# Altium PCB CH32X035F7P6-R0-1v0.PcbDoc
Units mil, origin at the board's own origin, x right, y up, seen from the top; angles counter-clockwise.
Board outline 1496.06 x 2165.35 mil, 2 copper layers (Top Layer, Bottom Layer); 30 components, 32 nets, 135 pads, 147 vias.
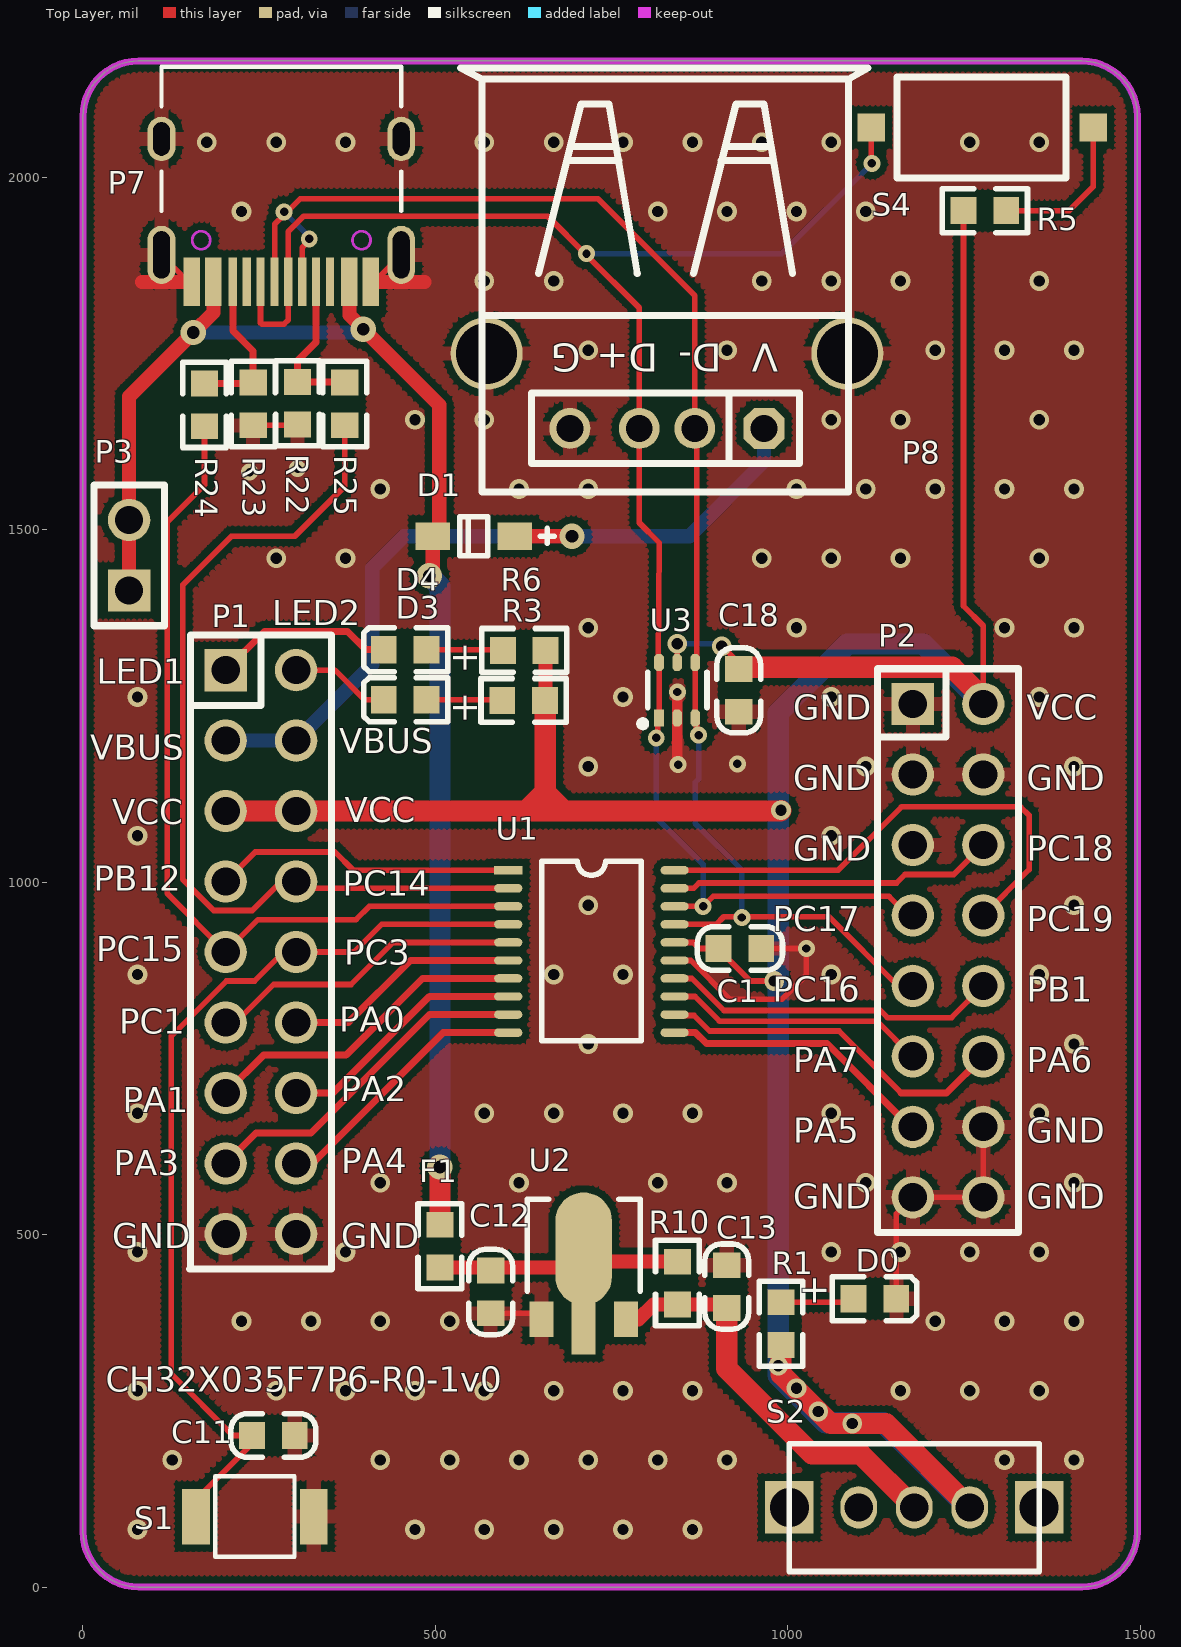
[diagram p0: Top Layer view]
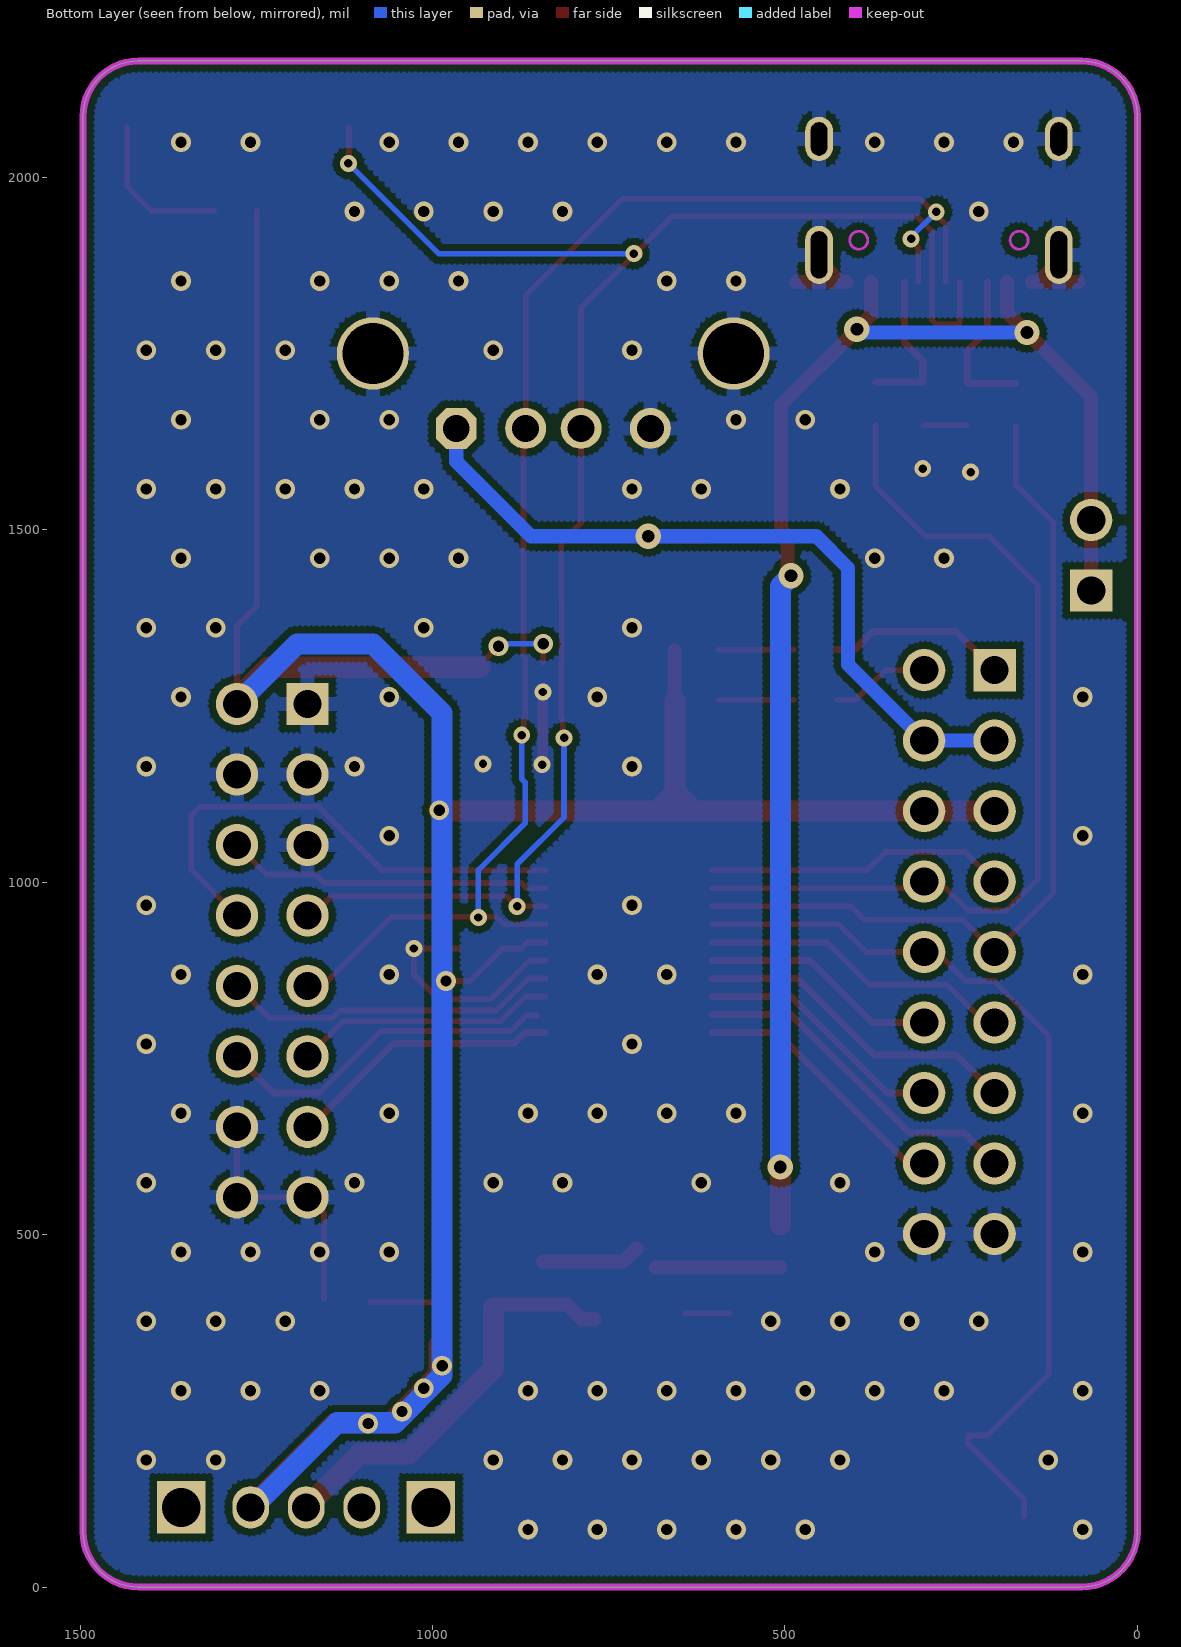
[diagram p1: Bottom Layer view, seen from below]

## Layer stack, top to bottom
Top Solder: solder mask 0.4, Solder Resist, Dk 3.5
Top Layer: signal copper 1.4
Dielectric1: dielectric 12.6, FR-4, Dk 4.8
Bottom Layer: signal copper 1.4
Bottom Solder: solder mask 0.4, Solder Resist, Dk 3.5

## Board outline
0,78.74 0,2086.61 cw(c78.74,2086.61) 78.74,2165.35 1417.32,2165.35 cw(c1417.32,2086.61) 1496.06,2086.61 1496.06,78.74 cw(c1417.32,78.74) 1417.32,0 78.74,0 cw(c78.74,78.74)

## Design rules (kind name [scope] priority, off if disabled: settings)
Clearance Clearance_1 [InPolygon] p1: gap=10 ignorepadtopadclearanceinfootprint=FALSE
Clearance [All] p2: gap=6 ignorepadtopadclearanceinfootprint=FALSE except(8: Arc-Via Track-Via SMDPad-Via THPad-Via Via-Via Via-Fill Via-Poly Via-Region Via-Hole)
ComponentClearance [All] p1 off: gap=10 collisioncheckmode=3 verticalgap=10 showdistances=FALSE
DiffPairsRouting [All] p1: maxlimit=10 minlimit=7 mostfreqgap=8 toplayer_minwidth=6 toplayer_maxwidth=15 toplayer_prefwidth=8 bottomlayer_minwidth=6 bottomlayer_maxwidth=15 bottomlayer_prefwidth=8 maxuncoupledlength=500
MinimumSolderMaskSliver [All] p1 off: minsoldermaskwidth=10
PolygonConnect PolygonConnect_1 [IsVia] p1: connectstyle=Direct reliefconductorwidth=10 reliefentries=4 polygonreliefangle="90 Angle" airgapwidth=10
PolygonConnect [All] p2: connectstyle=Relief reliefconductorwidth=20 reliefentries=4 polygonreliefangle="90 Angle" airgapwidth=10
RoutingVias [All] p1: holewidth=16 width=28 viastyle="Through Hole" minholewidth=12 minwidth=24 maxholewidth=28 maxwidth=50
SilkToSilkClearance [All] p1 off: silktosilkclearance=10
SilkToSolderMaskClearance [IsPad] p1 off: minsilkscreentomaskgap=10 clearancetoexposedcopper=TRUE
SolderMaskExpansion [All] p1: expansion=2 istentingtop=FALSE
Width [All] p1: maxlimit=100 minlimit=6 preferedwidth=10
25 further rules are at their usual default settings.

## Components (designator, comment, footprint, x,y, rotation, side; value= is the part's Value field where it differs from the comment)
C1 "0.1uF" 0603_C 962.48,906 r180 top
C11 "0.1uF" 0603_C 300.48,215 r180 top
C12 "10uF" 0603_C 578.48,449 r270 top
C13 "10uF" 0603_C 913.48,396 r90 top
C18 "0.1uF" 0603_C 930.48,1242 r90 top
D0 "POWER  red" 0603+ 1093.48,409 r0 top
D1 "Diode" SOD-123 612.48,1491 r180 top
D3 "LED2" 0603+ 487.48,1259 r180 top
D4 "LED1" 0603+ 487.48,1330 r180 top
F1 "500mA" 0603 506.48,514 r270 top
P1 "Header 9X2" IDC18-2.54mm 202.48,1301 r0 top
P2 "Header 8X2" IDC16-2.54mm 1177.48,1253 r0 top
P3 "HEADER 2" SIP2-2.54mm 65.48,1414 r0 top
P7 "TYPE-C" TYPE-C-Receptacle-2.0 281.48,1852 r180 top
P8 "USB_A" USBAF 966.48,1644 r180 top
R1 "1K" 0603 990.48,404 r270 top
R3 "1K" 0603 655.48,1258 r180 top
R5 "4.7K" 0603 1249.48,1953 r0 top
R6 "1K" 0603 656.48,1329 r180 top
R10 "NC(0Ω)" 0603 843.48,401 r90 top
R22 "5.1K" 0603 304.48,1710 r270 top
R23 "5.1K" 0603 241.48,1709 r270 top
R24 "0Ω" 0603 172.48,1647 r90 top
R25 "0Ω" 0603 371.48,1709 r270 top
S1 "KEY" 贴片按键 160.48,100 r0 top
S2 "SW" SW1 1179.48,113 r0 top
S4 "Download" SMD_6.1x3.65x2.5mm-KEY 1433.48,2071 r180 top
U1 "CH32X035F7P6" TSSOP20 603.48,1017 r270 top
U2 "HT7533" SOT-89 650.48,380 r0 top
U3 "CH412K" SOT-363 817.48,1233 r0 top

## Footprints (in the part's own frame and the unit in brackets; to place one, negate y for a bottom-side part, rotate by r counter-clockwise, add the part's x,y. Pads: shape width x height; smd on the part's side, far side on the other; paste and mask are expansions set on the pad)
0603 [mm]
  rect 0.93x0.98 smd: 1(0,0) 2(1.54,0)
  silkscreen extent -0.76,-0.79 2.3,0.79
0603+ [mm]
  rect 0.93x0.98 smd: 1(0,0) 2(1.54,0)
  silkscreen extent -0.76,-0.79 2.27,0.79
0603_C [mm]
  rect 0.93x0.98 smd mask+0.051: 1(0,0) 2(1.54,0)
  silkscreen extent -0.76,-0.79 2.31,0.79
IDC16-2.54mm [mil]
  rect 60x60 hole 40: 1(0,0)
  round 60 hole 40: 2(100,0) 3(0,-100) 4(100,-100) 5(0,-200) 6(100,-200) 7(0,-300) 8(100,-300) 9(0,-400) 10(100,-400) 11(0,-500) 12(100,-500) 13(0,-600) 14(100,-600) 15(0,-700) 16(100,-700)
  silkscreen extent -50,-750 150,50
IDC18-2.54mm [mil]
  rect 60x60 hole 40: 1(0,0)
  round 60 hole 40: 2(100,0) 3(0,-100) 4(100,-100) 5(0,-200) 6(100,-200) 7(0,-300) 8(100,-300) 9(0,-400) 10(100,-400) 11(0,-500) 12(100,-500) 13(0,-600) 14(100,-600) 15(0,-700) 16(100,-700) 17(0,-800) 18(100,-800)
  silkscreen extent -51,-850 150,50
SIP2-2.54mm [mil]
  rect 60x60 hole 40: 1(0,0)
  round 60 hole 40: 2(0,100)
  silkscreen extent -50,-50 50,150
SMD_6.1x3.65x2.5mm-KEY [mm]
  rect 1x1 smd: 1(0,0) 2(8,0)
  silkscreen extent 0.98,-1.83 7.08,1.83
SOD-123 [mm]
  rect 1.25x1 smd: 1(0,0) 2(2.95,0)
  silkscreen extent -1.43,-0.7 1.97,0.7
SOT-89 [mil]
  rect 34x50 smd: 1(0,0) 3(120,0)
  rect 34x100 smd: 2(60,0)
  oval 80x160 smd: ""(60,100)
  silkscreen extent -20,40 140,170
SOT-363 [mm]
  rect 0.35x0.6 smd mask+0.051: 1(0,0)
  oct 0.35x0.6 smd mask+0.051: 2(0.65,0) 3(1.3,0) 4(1.3,2) 5(0.65,2) 6(0,2)
  silkscreen extent -0.7,-0.31 1.73,1.65
SW1 [mm]
  rect 1.75x1.9 hole 1.4: 0(-4.5,0) 0(4.5,0)
  oval 1.321x1.524 hole 1.016: 1(0,0) 2(-2,0) 3(2,0)
  silkscreen extent -4.51,-2.31 4.5,2.29
TSSOP20 [mil]
  rect 12x40 smd: 1(0,0)
  oval 12x40 smd: 2(25.6,0) 3(51.2,0) 4(76.8,0) 5(102.4,0) 6(128,0) 7(153.5,0) 8(179.1,0) 9(204.7,0) 10(230.3,0) 11(230.3,236) 12(204.7,236) 13(179.1,236) 14(153.5,236) 15(128,236) 16(102.4,236) 17(76.8,236) 18(51.2,236) 19(25.6,236) 20(0,236)
  silkscreen extent -13,47 242,189
TYPE-C-Receptacle-2.0 [mm]
  oval 1x2.1 hole 0.6 slot 1.7 at 90 deg: 0(-4.32,-0.97) 0(4.32,-0.97)
  oval 1x1.6 hole 0.6 slot 1.2 at 90 deg: 0(-4.32,-5.15) 0(4.32,-5.15)
  rect 0.6x1.75 smd mask+0.051: A1(-3.225,0) A4(-2.45,0) B1(3.225,0) B4(2.45,0)
  rect 0.3x1.75 smd mask+0.051: A5(-1.25,0) A6(-0.25,0) A7(0.25,0) A8(1.25,0) B5(1.75,0) B6(0.75,0) B7(-0.75,0) B8(-1.75,0)
  Keep-Out Layer circle w0.1: c-2.89,-1.5 r0.325
  Keep-Out Layer circle w0.1: c2.89,-1.5 r0.325
  silkscreen extent -4.32,-7.75 4.32,-2.55
USBAF [mm]
  round 2.6 hole 2.2: 0(-3,-2.7) 0(10,-2.7)
  oct 1.473x1.473 hole 0.965: 1(0,0)
  round 1.473 hole 0.965: 2(2.5,0) 3(4.5,0) 4(7,0)
  silkscreen extent -3.75,-12.99 10.95,2.29
贴片按键 [mm]
  rect 1x2 smd: 1(0,0) 2(4.242,0)
  silkscreen extent 0.69,-1.45 3.55,1.45

## Part data
C1 C11 C18: library part Cap, "Capacitor"
  C11: LatestRevisionDate=17-Jul-2002, LatestRevisionNote="Re-released for DXP Platform.", PackageReference=RAD-0.3, Published=8-Jun-2000, Publisher="Altium Limited"
C12 C13: library part CAP, "Capacitor"
D0 D3 D4: library part LED0, "Typical INFRARED GaAs LED", LatestRevisionDate=08-Jul-2005, LatestRevisionNote="Mech Layer 1 removed.", PackageReference=LED-0, Published=8-Jun-2000, Publisher="Altium Limited"
D1: "Default Diode", Code_JEDEC=DO-214-AB, LatestRevisionDate=17-Jul-2002, LatestRevisionNote="Re-released for DXP Platform.", PackageReference=SMC, PackageVersion=Sep-1996, Published=8-Jun-2000, Publisher="Altium Limited"
F1: library part FUSE1, "Fuse"
P1: "Header, 9-Pin, Dual row", LatestRevisionDate=17-Jul-2002, LatestRevisionNote="Re-released for DXP Platform.", Publisher="Altium Limited"
P2: "Header, 8-Pin, Dual row", LatestRevisionDate=17-Jul-2002, LatestRevisionNote="Re-released for DXP Platform.", Publisher="Altium Limited"
P3: "Header, 2-Pin"
P7: library part TYPE-C1
P8: library part USB, "USB Port"
R1 R3 R6: library part "Res Semi", "Semiconductor Resistor"
R5 R10 R22 R23 R24 R25: library part Res2, "Resistor"
S4: library part KEY1
U1: "RISC-V MCU with USB/PD/ADC/SPI/I2C/UART/OA/CMP"
U2: library part 1117-3.3V
U3: "Qaud ESD protect, high speed"

## Via types
v1: diameter 27.99, hole 16, Top Layer to Bottom Layer, tented both sides, 120 vias
v2: diameter 24, hole 12, Top Layer to Bottom Layer, tented both sides, 14 vias
v3: diameter 28, hole 16, Top Layer to Bottom Layer, tented both sides, 8 vias
v4: diameter 36, hole 18, Top Layer to Bottom Layer, tented both sides, 5 vias

## Nets (pads, with @x,y where several pads share a name; then routed paths per layer and width w, separated by ;. In a path a pad name is that pad's centre, name@x,y a point inside that pad or via, vN(x,y) a via of type N, cw(c..) or ccw(c..) an arc to the next point about the centre after c; other vN are vias at no path point)
5V: C12.1 F1.2 R10.2 U2. U2.2 | length 318
  Top Layer w20: F1.2 U2.@683.85,453.37 ; U2. 728.85,461.63 R10.2
CC1: P1.8 R25.2 U1.2 | length 1293.5
  Top Layer w8: R25.2 371.48,1562 300.48,1491 210.48,1491 141.48,1422 141.48,1004.02 167.49,978.01 185.5,960 240.27,960 281.27,1001 P1.8 312.08,991.4 U1.2
CC2: P1.9 R24.1 U1.3 | length 1230.2
  Top Layer w8: R24.1 172.48,1564 119.48,1511 119.48,984 P1.9 248.48,947 387.48,947 406.28,965.8 U1.3
GND: C1.1 C11.1 C12.2 C13.2 C18.1 D0.2 P1.17 P1.18 P2.1 P2.3 P2.4 P2.5 P2.14 P2.15 P2.16 P7.0 P7.A1 P7.B1 P8.0 P8.4 R22.2 R23.2 S1.2 U1.15 U2.1 U3.2 | length 1181
  Top Layer w8: P7.0@116.32,1890.19 111.4,1890.19 149.59,1852 P7.B1 ; R23.2 R22.2@303.48,1648.37 ; P7.A1 413.37,1852 P7.0@451.56,1890.19 ; C12.2 U2.1@642.11,388.37 ; U1.15 862.48,889 917.48,834 991.77,834 1026.48,868.71 v2(1026.48,906) C1.1 ; D0.2 1154.11,529.63 P2.15 P2.16 P2.14
  Top Layer w15: v2@843.48,1169.08 v2(843.48,1270)
  Top Layer w20: 83.65,1852 P7.B1@149.59,1852 ; P7.A1@413.37,1852 484.48,1852 ; v2@843.48,1169.08 844.48,1168.08 v2(844.48,1167)
  Bottom Layer w8: P2.5@1164.48,1053 P2.5
  other v1: 77.36,81.65 471.06,81.65 569.49,81.65 667.91,81.65 766.34,81.65 864.76,81.65 126.57,180.08 421.85,180.08 520.28,180.08 618.7,180.08 717.13,180.08 815.55,180.08 913.98,180.08 1307.68,180.08 1406.1,180.08 77.36,278.5 274.21,278.5 372.64,278.5 471.06,278.5 569.49,278.5 667.91,278.5 766.34,278.5 864.76,278.5 1160.04,278.5 1258.46,278.5 1356.89,278.5 225,376.93 323.43,376.93 421.85,376.93 520.28,376.93 1209.25,376.93 1307.68,376.93 1406.1,376.93 77.36,475.35 372.64,475.35 1061.61,475.35 1160.04,475.35 1258.46,475.35 1356.89,475.35 421.85,573.78 618.7,573.78 815.55,573.78 913.98,573.78 1110.83,573.78 1406.1,573.78 77.36,672.2 569.49,672.2 667.91,672.2 766.34,672.2 864.76,672.2 1061.61,672.2 1356.89,672.2 717.13,770.63 1406.1,770.63 77.36,869.06 667.91,869.06 766.34,869.06 1061.61,869.06 1356.89,869.06 717.13,967.48 1406.1,967.48 77.36,1065.91 1061.61,1065.91 717.13,1164.33 1110.83,1164.33 1406.1,1164.33 77.36,1262.76 766.34,1262.76 1061.61,1262.76 1356.89,1262.76 717.13,1361.18 1012.4,1361.18 1307.68,1361.18 1406.1,1361.18 274.21,1459.61 372.64,1459.61 963.19,1459.61 1061.61,1459.61 1160.04,1459.61 1356.89,1459.61 421.85,1558.03 618.7,1558.03 717.13,1558.03 1012.4,1558.03 1110.83,1558.03 1209.25,1558.03 1307.68,1558.03 1406.1,1558.03 471.06,1656.46 569.49,1656.46 1061.61,1656.46 1160.04,1656.46 1356.89,1656.46 717.13,1754.88 913.98,1754.88 1209.25,1754.88 1307.68,1754.88 1406.1,1754.88 569.49,1853.31 667.91,1853.31 963.19,1853.31 1061.61,1853.31 1160.04,1853.31 1356.89,1853.31 225,1951.73 815.55,1951.73 913.98,1951.73 1012.4,1951.73 1110.83,1951.73 175.79,2050.16 274.21,2050.16 372.64,2050.16 569.49,2050.16 667.91,2050.16 766.34,2050.16 864.76,2050.16 963.19,2050.16 1061.61,2050.16 1258.46,2050.16 1356.89,2050.16
  other v2: 928.48,1168 236.48,1582 304.48,1587
LED1: D4.2 P1.1 | length 257.9
  Top Layer w10: P1.1 257.48,1356 375.48,1356 401.48,1330 D4.2
LED2: D3.2 P1.2 | length 141.8
  Top Layer w8: P1.2 357.48,1301 399.48,1259 D3.2
NetC13_1: C13.1 R10.1 S2.1 U2.3 | length 580.3
  Top Layer w20: U2.3 788.48,380 809.48,401 R10.1 C13.1@908.48,401
  Top Layer w30: C13.1 913.48,310 1034.48,189 1103.48,189 S2.1
NetD0_1: D0.1 R1.1 | length 98
  Top Layer w8: R1.1 D0.1@1088.48,404
NetD3_1: D3.1 R3.2 | length 106.4
  Top Layer w8: D3.1 R3.2@593.85,1259
NetD4_1: D4.1 R6.2 | length 107.4
  Top Layer w8: D4.1 R6.2@594.85,1330
NetP7_A5: P7.A5 R22.1 R25.1 | length 218.9
  Top Layer w10: P7.A5 330.69,1766.21 304.48,1740 R22.1 R25.1@370.48,1710
NetP7_B5: P7.B5 R23.1 R24.2 | length 222.6
  Top Layer w10: R24.2 R23.1@240.11,1707.63 ; P7.B5 212.58,1782.9 241.48,1754 R23.1
NetR5_2: R5.2 S4.1 | length 221.5
  Top Layer w8: R5.2 1399.48,1953 1433.48,1987 S4.1
PA0: P1.12 U1.6 | length 337.5
  Top Layer w10: P1.12 376.48,801 464.48,889 U1.6
PA1: P1.13 U1.7 | length 468.3
  Top Layer w10: P1.13 256.48,755 373.48,755 481.98,863.5 U1.7
PA2: P1.14 U1.8 | length 357.7
  Top Layer w10: P1.14 354.48,701 491.38,837.9 U1.8
PA3: P1.15 U1.9 | length 488.5
  Top Layer w10: P1.15 245.48,644 323.48,644 491.78,812.3 U1.9
PA4: P1.16 U1.10 | length 377.9
  Top Layer w10: P1.16 325.48,601 511.18,786.7 U1.10
PA5: P2.13 U1.11 | length 393.4
  Top Layer w10: U1.11 868.78,786.7 884.48,771 1055.48,771 1173.48,653 P2.13
PA6: P2.12 U1.12 | length 493.1
  Top Layer w8: U1.12@851.48,811 867.11,811 889.11,789 1073,789 1161,701
  Top Layer w10: 1161,701 1225.48,701 P2.12
PA7: P2.11 U1.13 | length 373.2
  Top Layer w8: U1.13 868.37,837.9 903.27,803 1040.55,803 1126.68,803 1176.68,753 P2.11
PB1: P2.10 U1.14 | length 479.6
  Top Layer w8: U1.14 863.98,863.5 909.48,818 1131.48,818 1141.48,808 1232.48,808 P2.10
PB12: P1.7 U1.1 | length 429.2
  Top Layer w8: P1.7 244.48,1043 357.48,1043 383.48,1017 U1.1
PC1: P1.11 U1.5 | length 448.1
  Top Layer w8: P1.11 216.48,801 270.48,855 380.48,855 440.08,914.6 U1.5
PC3: C11.2 P1.10 S1.1 U1.4 | length 1321.8
  Top Layer w8: S1.1 160.48,124 239.85,203.37 C11.2 212.48,215 125.48,302 125.48,781.98 203.5,860 243.48,860 284.48,901 P1.10 384.48,901 423.68,940.2 U1.4
PC16: P2.9 P7.A7 P7.B7 P8.2 U1.17 U3.3 U3.4 | length 2147.7
  Top Layer w8: P7.A7 272,1852.36 272,1933.61 285.27,1946.88 v2(285.27,1951.21) ; v2@287.48,1949 308.48,1970 730.48,1970 868.06,1832.43 P8.2 871,1641.06 871,1320.1 868.66,1317.76 U3.3 870.45,1231.21 870.45,1211.85 v2(873.48,1208.82) ; P7.B7 311.01,1900.31 321,1910.31 v2(321,1913) ; U1.17 898.45,940.2 909.25,951 1058.48,951 P2.9@1156.58,852.9 ; P2.9@1177.38,852.9 P2.9
  Bottom Layer w8: v2(285.27,1951.21) 321,1915.48 v2(321,1913) ; v2(873.48,1208.82) 873.48,1146.56 868.66,1141.74 868.66,1083.82 935,1017.48 v2(935,950)
PC17: P2.7 P7.A6 P7.B6 P8.3 S4.2 U1.18 U3.1 U3.6 | length 2533.4
  Top Layer w8: P7.B6 251.95,1793.47 253.43,1792 285.48,1792 291.32,1797.84 P7.A6 291.32,1923.32 313,1945 659.48,1945 713.48,1891 789.32,1815.17 P8.3 789.32,1510.17 817.48,1482 U3.6@816.48,1311.75 ; v2(813.48,1205) 815.48,1207 815.48,1231 U3.1 U3.6 ; U1.18 v2(879.97,965.8) 894.17,980 1143.71,980 1170.71,953 P2.7 ; v2@1118.52,2028.04 S4.2
  Bottom Layer w8: v2(714.48,1892) 991.48,1892 v2(1119.48,2020) ; v2(813.48,1205) 813.48,1092 879.97,1025.51 v2(879.97,965.8)
PC18: P2.6 U1.19 | length 463.5
  Top Layer w8: U1.19 866.4,991.4 874,999 1154.48,999 1166.48,1011 1235.48,1011 P2.6
PC19: P2.8 U1.20 | length 714.2
  Top Layer w8: U1.20 1071.48,1017 1161.48,1107 1330.48,1107 1342.48,1095 1342.48,1018 P2.8
VBUS: D1.1 P1.3 P1.4 P8.1 | length 1140.3
  Top Layer w20: D1.1 v4(693.85,1491) v4@697.48,1491
  Bottom Layer w20: P1.3 P1.4 410.48,1309 410.48,1446 455.48,1491 v4(693.85,1491) 860.48,1491 966.48,1597 P8.1
VBUS1: D1.2 F1.1 P3.1 P3.2 P7.A4 P7.B4 | length 2153.8
  Top Layer w8: P7.B4@185.02,1820.7 P7.B4
  Top Layer w20: P3.1 P3.2 65.48,1689 v4(156.51,1780.03) 185.02,1808.54 P7.B4 ; P7.A4 377.94,1804.69 v4(397.89,1784.73) 505.48,1677.14 505.48,1500.14 D1.2 v4@496.34,1444.14
  Top Layer w30: F1.1 v4(506.48,596)
  Bottom Layer w20: v4(156.51,1780.03) 393.19,1780.03 v4(397.89,1784.73)
  Bottom Layer w30: v4(491.48,1435) 506.48,1420 v4(506.48,596)
VCC: C1.2 C18.2 P1.5 P1.6 P2.2 R1.2 R3.1 R5.1 R6.1 S2.3 U1.16 U3.5 | length 4500.7
  Top Layer w8: R3.1 R3.1@655.96,1257.52 ; U1.16 865.88,914.6 874.48,906 884.48,906 C1.2 901.85,905.02 946.87,860 v3(981,860) ; U3.5 v3(843.07,1338.59) ; v3(906.48,1335) C18.2@930.48,1311 ; R5.1 1249.48,1392 1277.48,1364 1277.48,1261 P2.2
  Top Layer w20: R3.1@656.48,1259 R6.1
  Top Layer w30: P1.5 P1.6 628.48,1101 ; 655.96,1127.52 R3.1@655.96,1257.52 ; C18.2@932.85,1305 1233.48,1305 P2.2@1277.48,1261 ; R1.2 990.48,302 v3(1043.48,249) 1060.48,232 v3(1091.48,232) 1139.22,232 S2.3 ; v3(990.48,1102) 989.48,1101 682.48,1101 ; 628.48,1101 655.48,1101 ; 628.48,1101 655.48,1128 ; 655.48,1101 682.48,1101 ; 655.48,1101 655.48,1128 ; 655.48,1128 682.48,1101
  Bottom Layer w8: v3(843.07,1338.59) 902.89,1338.59 v3(906.48,1335)
  Bottom Layer w30: S2.3 1255.48,113 1135.48,233 1053.48,233 986.48,300 v3(986.48,314) 986.48,1240 1084.48,1338 1192.48,1338 P2.2
  other v3: 1012.48,282
pads on no net: P7.A8 P7.B8 S2.0 S2.2

## Polygon pours and split planes (outlines as drawn)
GND on Bottom Layer "Top Layer-No Net" (hatched 90Degree grid 8 track 8, remove dead copper, pour order 1): 0,2165.35 1496.06,2165.35 1496.06,0 0,0 0,2154.87 10.48,2165.35
GND on Top Layer "Top Layer-No Net" (hatched 90Degree grid 8 track 8, remove dead copper, pour order 0): 0,2165.35 1496.06,2165.35 1496.06,0 -7.52,0 -8.52,1 -7.52,0 0,0 0,2157

## Keep-outs
Keep-Out Layer:
  the board outline again, w10

## Silkscreen, mask and mechanical layers (free items; w line width, h text height)
Top Overlay:
  text "LED2" at 268.48,1365 h35
  text "LED1" at 19.48,1282 h35
  text "GND" at 1007.64,1230.8 h35
  text "VCC" at 1339.48,1230.8 h35
  text "VBUS" at 363.48,1183 h35
  text "VBUS" at 10.48,1174 h35
  text "GND" at 1007.64,1130.69 h35
  text "GND" at 1339.48,1130.69 h35
  text "VCC" at 371.48,1085 h35
  text "VCC" at 41.48,1082 h35
  text "GND" at 1007.64,1030.57 h35
  text "PC18" at 1339.48,1030.57 h35
  text "PB12" at 15.48,988 h35
  text "PC14" at 368.48,981 h35
  text "PC17" at 978.48,930.46 h35
  text "PC19" at 1339.48,930.46 h35
  text "PC15" at 18.48,888 h35
  text "PC3" at 370.48,883 h35
  text "PC16" at 978.48,830.34 h35
  text "PB1" at 1339.48,830.34 h35
  text "PA0" at 363.48,788 h35
  text "PC1" at 51.48,785 h35
  text "PA7" at 1007.64,730.23 h35
  text "PA6" at 1339.48,730.23 h35
  text "PA2" at 365.48,689 h35
  text "PA1" at 56.48,674 h35
  text "PA5" at 1007.64,630.11 h35
  text "GND" at 1339.48,630.11 h35
  text "PA4" at 366.48,587 h35
  text "PA3" at 43.48,584 h35
  text "GND" at 1007.64,537 h35
  text "GND" at 1339.48,537 h35
  text "GND" at 41.48,481 h35
  text "GND" at 366.48,481 h35
  text "CH32X035F7P6-R0-1v0" at 32,277 h35
Mechanical 1:
  the board outline again, w10

## Text inside footprints (layer, text, board x,y; h text height)
D0: Top Overlay "+" at 1055.4,398.01 h40 r90
D3: Top Overlay "+" at 525.56,1269.99 h40 r270
D4: Top Overlay "+" at 525.56,1340.99 h40 r270
P8: Top Overlay "D-" at 906.48,1764 h40 r180; Top Overlay "D+" at 816.48,1764 h40 r180; Top Overlay "V" at 986.48,1764 h40 r180; Top Overlay "G" at 706.48,1764 h40 r180